# EAGLE board module_pcb (EAGLE 9.7.0)
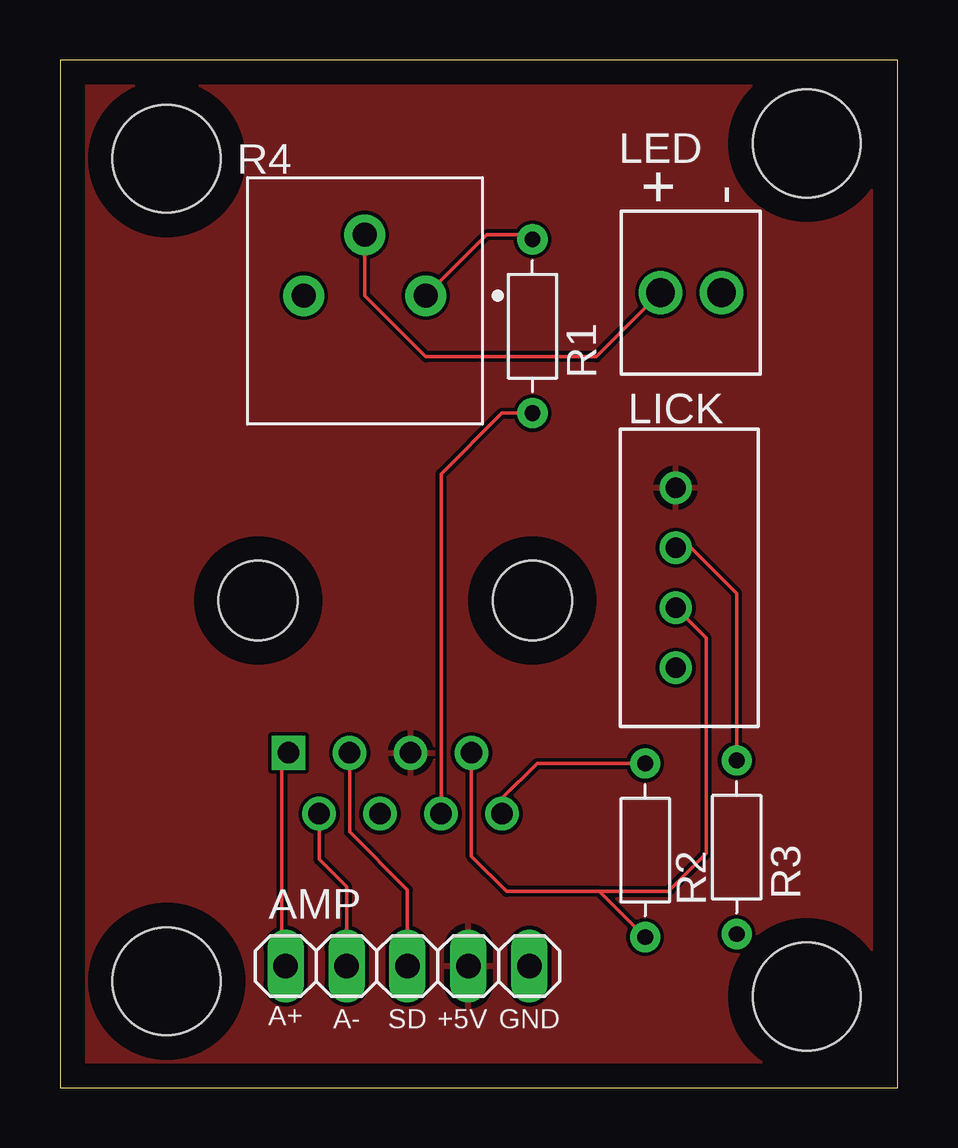
[diagram p0: board, top side]
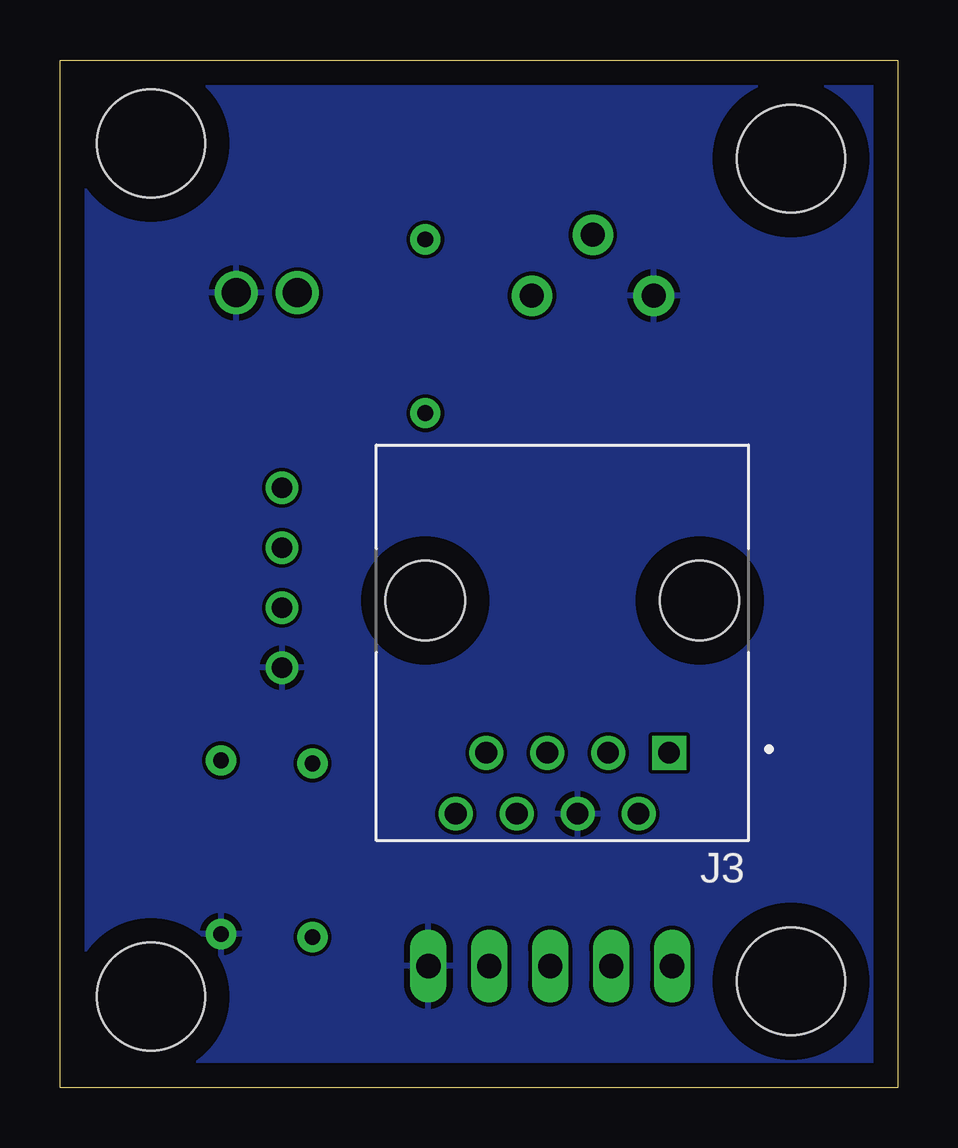
[diagram p1: board, bottom side, seen from below]

Size 34.91 x 42.85 mm. Coordinates in mm from the lower left corner, seen from the top.
Outline: 0,0 34.91,0 34.91,42.85 0,42.85 0,0
Copper layers (1*16): Top 0.035mm / dielectric 1.5mm / Bottom 0.035mm
Design rules "default *": minimum track width 6mil, minimum drill 0.35mm, track to track 6mil, track to pad 6mil, pad to pad 6mil, via to via 6mil, smd to smd 6mil, copper to edge 40mil, drill to drill 6mil, minimum pad ring 10mil, minimum via ring 8mil, stop-mask expansion 4mil, vias tented up to drill 0mil, thermal gap 10mil
Holes 4.5 mm at 4.45,38.73 4.45,4.45 31.11,3.81 31.11,39.37

## Footprints (pad centres in the part's own frame; a part is rotated, then mirrored left to right if it is on the bottom)
1X05 = drill 1.016 long: 1 -5.08,0; 2 -2.54,0; 3 0,0; 4 2.54,0; 5 5.08,0
ASSMANN_A-2014-2-4-N-T-R = drill 0.9 square: 1 -4.445,6.35 | drill 0.9: 2 -3.175,8.89; 3 -1.905,6.35; 4 -0.635,8.89; 5 0.635,6.35; 6 1.905,8.89; 7 3.175,6.35; 8 4.445,8.89 | hole 3.3: 5.715,0; -5.715,0
TERMBLK_254-2N = drill 1.2: 1 0,0; 2 2.54,0
B4B-XH-A = drill 0.84: 1 0,0; 2 2.5,0; 3 5,0; 4 7.5,0
RESAD724W46L381D178B = drill 0.66 pad 1.26: 1 -3.62,0; 2 3.62,0
PV36P = drill 1 pad 1.7: 1 0,0; 2 2.54,-2.54; 3 5.08,0

## Placement (x,y rotation side)
AMP  PINHD-1X5  [1X05]  14.48,5.08 180 top
J3  A-2014-2-4-N-T-R  [ASSMANN_A-2014-2-4-N-T-R]  13.97,20.32 180 bottom
LED  2828XX-2282834-2  [TERMBLK_254-2N]  27.56,33.15 180 top
LICK  B4B-XH-A  [B4B-XH-A]  25.65,25.02 270 top
R1  220Ω  [RESAD724W46L381D178B]  19.68,31.75 90 top
R2  22kΩ  [RESAD724W46L381D178B]  24.38,9.91 270 top
R3  68Ω  [RESAD724W46L381D178B]  28.19,10.03 270 top
R4  1kΩ  [PV36P]  15.24,33.02 180 top

## Library data of the parts
AMP = Connector; CATEGORY: Headers; DESCRIPTION: Header, Straight, 5 Position; MANUFACTURER: Generic; MPN: Generic; OPERATING_TEMPERATURE: Generic; PART_STATUS: Active; PITCH: 0.100" (2.54mm); ROHS_COMPLIANCE: Generic; SERIES: Generic; SUB-CATEGORY: Headers, Male Pins; TYPE: Board to Board or Cable, Unshrouded, Through Hole, Straight
J3 = RJ45Library; MANUFACTURER: Assmann WSW; MAXIMUM_PACKAGE_HIEGHT: 16.58mm; PARTREV: 01; STANDARD: Manufacturer Recommendations
LED = Connector; CATEGORY: Fixed Terminal Blocks; DESCRIPTION: Fixed Terminal Blocks 2P SIDE ENTRY 2.54mm; MANUFACTURER: TE Connectivity AMP Connectors; MPN: 282834-2; OPERATING_TEMPERATURE: -40°C ~ 105°C; PART_STATUS: Active; PITCH: 0.100" (2.54mm); ROHS_COMPLIANCE: RoHS Compliant; SERIES: Buchanan; SUBCATEGORY: Terminal Blocks; TYPE: Through Hole; Screw - Rising Cage Clamp; Side wire entry, Horizontal with Board
LICK = Connector; CATEGORY: Header; DSECRIPTION: Connector Header Through Hole 4 position 0.098" (2.50mm); MANUFACTURER: JST Sales America Inc.; MPN: B4B-XH-A(LF)(SN); OPERATING_TEMPERATURE: -25 C to 85 C; PART_STATUS: ACTIVE; PITCH: 0.098" (2.50mm); ROHS_COMPLIANCE: ROHS3 Compliant; SERIES: XH; SUB_CATEGORY: Rectangular Connectors; TYPE: Header, Male Pin, Board to Cable/Wire, Through Hole
R1-R3 = Resistor; CATEGORY: Resistor; SUB-CATEGORY: Fixed
R4 = Resistor; CATEGORY: Resistor; DESCRIPTION: Lead Sealed Type Multiturn PV36 Series; MANUFACTURER: BOURNS; MPN: PV36P; OPERATING_TEMPERATURE: -55 to +125 °C; PART_STATUS: Active; ROHS_COMPLIANCE: RoHS Compliant; SERIES: PV36; SUB-CATEGORY: Trimpot; TYPE: Lead Sealed

## Nets
+3.3V: J3.8 R2.1
+5V: AMP.2 J3.5 LICK.1
A+: AMP.5 J3.1
A-: AMP.4 J3.2
GND: AMP.1 J3.4 LED.1 LICK.4 R3.2 R4.3
LED_ON: J3.6 R1.1
LICK: J3.7 LICK.3 R2.2
N$1: LICK.2 R3.1
N$2: LED.2 R4.2
N$4: R1.2 R4.1
SD: AMP.3 J3.3

## Tracks (layer width: path | path; a pad name or v marks a point on that pad's centre or on a via)
+3.3V
  Top 0.152: J3.8 18.41,12.07 19.88,13.53 R2.1
+5V
  pour Top: 0.08,0.08 34.83,0.08 34.83,42.77 0.08,42.77
A+
  Top 0.152: AMP.5 9.25,5.23 9.25,13.61 9.53,13.89 J3.1
A-
  Top 0.152: J3.2 10.79,9.53 11.94,8.38 AMP.4
GND
  pour Bottom: 0.08,0.08 34.83,0.08 34.83,42.77 0.08,42.77
LED_ON
  Top 0.152: R1.1 18.41,28.13 15.88,25.59 J3.6
LICK
  Top 0.152: 24.44,6.29 R2.2 | R2.2 | R2.2 24.45,6.29 | LICK.3 26.92,18.75 26.92,9.78 25.34,8.19 22.48,8.19 | R2.2 22.48,8.19 | 22.48,8.19 18.61,8.19 17.14,9.66 J3.7
N$1
  Top 0.152: R3.1 28.19,20.61 26.29,22.52 LICK.2
N$2
  Top 0.152: LED.2 22.35,30.48 15.24,30.48 12.7,33.02 R4.2
N$4
  Top 0.152: R1.2 19.5,35.56 17.78,35.56 R4.1
SD
  Top 0.152: 14.35,5.21 AMP.3 14.48,8.25 12.06,10.67 J3.3

## Text on the board
tNames: + | - | A+ | A- | SD | +5V | GND